# EAGLE board CT_schematic (EAGLE 7.6.0)

Size 100 x 80 mm. Coordinates in mm from the lower left corner, seen from the top.
Outline: 0,0 100,0 100,80 0,80 0,0
Copper layers (1*16): Top 0.035mm / dielectric 1.5mm / Bottom 0.035mm
Design rules "default": minimum track width 10mil, minimum drill 24mil, track to track 8mil, track to pad 8mil, pad to pad 8mil, via to via 8mil, smd to smd 8mil, copper to edge 40mil, drill to drill 8mil, minimum pad ring 10mil, minimum via ring 8mil, stop-mask expansion 4mil, vias tented up to drill 0mil, thermal gap 10mil

## Footprints (pad centres in the part's own frame; a part is rotated, then mirrored left to right if it is on the bottom)
C0603 = smd 0.8 x 0.8: 1 -0.762,0; 2 0.762,0
C0402 = smd 0.5 x 0.5: 1 -0.508,0; 2 0.508,0
C0805 = smd 1.2 x 1.3: 1 -1.016,0; 2 1.016,0
C1210 = smd 1.2 x 2.5: 1 -1.524,0; 2 1.524,0
R0603 = smd 0.8 x 0.8: 1 -0.762,0; 2 0.762,0
EXV-9H = smd 3.505 x 1.676: 1 -2.857,0; 2 2.857,0
L0603 = smd 0.8 x 0.8: 1 -0.762,0; 2 0.762,0
IND25X25CZ = smd 2.489 x 3.429: 1 -2.718,0; 2 2.718,0
PJ-037B_PACKAGE = drill 3.7 square: 1 12,0 | drill 3.2 square: 2 6,0
LQFP208 = smd 0.3 x 1.2: 1 -12.75,-14.4; 2 -12.25,-14.4; 3 -11.75,-14.4; 4 -11.25,-14.4; 5 -10.75,-14.4; 6 -10.25,-14.4; 7 -9.75,-14.4; 8 -9.25,-14.4; 9 -8.75,-14.4; 10 -8.25,-14.4; 11 -7.75,-14.4; 12 -7.25,-14.4; 13 -6.75,-14.4; 14 -6.25,-14.4; 15 -5.75,-14.4; 16 -5.25,-14.4; 17 -4.75,-14.4; 18 -4.25,-14.4; 19 -3.75,-14.4; 20 -3.25,-14.4; 21 -2.75,-14.4; 22 -2.25,-14.4; 23 -1.75,-14.4; 24 -1.25,-14.4; 25 -0.75,-14.4; 26 -0.25,-14.4; 27 0.25,-14.4; 28 0.75,-14.4; 29 1.25,-14.4; 30 1.75,-14.4; 31 2.25,-14.4; 32 2.75,-14.4; 33 3.25,-14.4; 34 3.75,-14.4; 35 4.25,-14.4; 36 4.75,-14.4; 37 5.25,-14.4; 38 5.75,-14.4; 39 6.25,-14.4; 40 6.75,-14.4; 41 7.25,-14.4; 42 7.75,-14.4; 43 8.25,-14.4; 44 8.75,-14.4; 45 9.25,-14.4; 46 9.75,-14.4; 47 10.25,-14.4; 48 10.75,-14.4; 49 11.25,-14.4; 50 11.75,-14.4; 51 12.25,-14.4; 52 12.75,-14.4; 105 12.75,14.4; 106 12.25,14.4; 107 11.75,14.4; 108 11.25,14.4; 109 10.75,14.4; 110 10.25,14.4; 111 9.75,14.4; 112 9.25,14.4; 113 8.75,14.4; 114 8.25,14.4; 115 7.75,14.4; 116 7.25,14.4; 117 6.75,14.4; 118 6.25,14.4; 119 5.75,14.4; 120 5.25,14.4; 121 4.75,14.4; 122 4.25,14.4; 123 3.75,14.4; 124 3.25,14.4; 125 2.75,14.4; 126 2.25,14.4; 127 1.75,14.4; 128 1.25,14.4; 129 0.75,14.4; 130 0.25,14.4; 131 -0.25,14.4; 132 -0.75,14.4; 133 -1.25,14.4; 134 -1.75,14.4; 135 -2.25,14.4; 136 -2.75,14.4; 137 -3.25,14.4; 138 -3.75,14.4; 139 -4.25,14.4; 140 -4.75,14.4; 141 -5.25,14.4; 142 -5.75,14.4; 143 -6.25,14.4; 144 -6.75,14.4; 145 -7.25,14.4; 146 -7.75,14.4; 147 -8.25,14.4; 148 -8.75,14.4; 149 -9.25,14.4; 150 -9.75,14.4; 151 -10.25,14.4; 152 -10.75,14.4; 153 -11.25,14.4; 154 -11.75,14.4; 155 -12.25,14.4; 156 -12.75,14.4 | smd 1.2 x 0.3: 53 14.4,-12.75; 54 14.4,-12.25; 55 14.4,-11.75; 56 14.4,-11.25; 57 14.4,-10.75; 58 14.4,-10.25; 59 14.4,-9.75; 60 14.4,-9.25; 61 14.4,-8.75; 62 14.4,-8.25; 63 14.4,-7.75; 64 14.4,-7.25; 65 14.4,-6.75; 66 14.4,-6.25; 67 14.4,-5.75; 68 14.4,-5.25; 69 14.4,-4.75; 70 14.4,-4.25; 71 14.4,-3.75; 72 14.4,-3.25; 73 14.4,-2.75; 74 14.4,-2.25; 75 14.4,-1.75; 76 14.4,-1.25; 77 14.4,-0.75; 78 14.4,-0.25; 79 14.4,0.25; 80 14.4,0.75; 81 14.4,1.25; 82 14.4,1.75; 83 14.4,2.25; 84 14.4,2.75; 85 14.4,3.25; 86 14.4,3.75; 87 14.4,4.25; 88 14.4,4.75; 89 14.4,5.25; 90 14.4,5.75; 91 14.4,6.25; 92 14.4,6.75; 93 14.4,7.25; 94 14.4,7.75; 95 14.4,8.25; 96 14.4,8.75; 97 14.4,9.25; 98 14.4,9.75; 99 14.4,10.25; 100 14.4,10.75; 101 14.4,11.25; 102 14.4,11.75; 103 14.4,12.25; 104 14.4,12.75; 157 -14.4,12.75; 158 -14.4,12.25; 159 -14.4,11.75; 160 -14.4,11.25; 161 -14.4,10.75; 162 -14.4,10.25; 163 -14.4,9.75; 164 -14.4,9.25; 165 -14.4,8.75; 166 -14.4,8.25; 167 -14.4,7.75; 168 -14.4,7.25; 169 -14.4,6.75; 170 -14.4,6.25; 171 -14.4,5.75; 172 -14.4,5.25; 173 -14.4,4.75; 174 -14.4,4.25; 175 -14.4,3.75; 176 -14.4,3.25; 177 -14.4,2.75; 178 -14.4,2.25; 179 -14.4,1.75; 180 -14.4,1.25; 181 -14.4,0.75; 182 -14.4,0.25; 183 -14.4,-0.25; 184 -14.4,-0.75; 185 -14.4,-1.25; 186 -14.4,-1.75; 187 -14.4,-2.25; 188 -14.4,-2.75; 189 -14.4,-3.25; 190 -14.4,-3.75; 191 -14.4,-4.25; 192 -14.4,-4.75; 193 -14.4,-5.25; 194 -14.4,-5.75; 195 -14.4,-6.25; 196 -14.4,-6.75; 197 -14.4,-7.25; 198 -14.4,-7.75; 199 -14.4,-8.25; 200 -14.4,-8.75; 201 -14.4,-9.25; 202 -14.4,-9.75; 203 -14.4,-10.25; 204 -14.4,-10.75; 205 -14.4,-11.25; 206 -14.4,-11.75; 207 -14.4,-12.25; 208 -14.4,-12.75
SSOP-28 = smd 1.5 x 0.4: 1 -3.625,4.225; 2 -3.625,3.575; 3 -3.625,2.925; 4 -3.625,2.275; 5 -3.625,1.625; 6 -3.625,0.975; 7 -3.625,0.325; 8 -3.625,-0.325; 9 -3.625,-0.975; 10 -3.625,-1.625; 11 -3.625,-2.275; 12 -3.625,-2.925; 13 -3.625,-3.575; 14 -3.625,-4.225; 15 3.625,-4.225; 16 3.625,-3.575; 17 3.625,-2.925; 18 3.625,-2.275; 19 3.625,-1.625; 20 3.625,-0.975; 21 3.625,-0.325; 22 3.625,0.325; 23 3.625,0.975; 24 3.625,1.625; 25 3.625,2.275; 26 3.625,2.925; 27 3.625,3.575; 28 3.625,4.225
FCI_10118193-0001LF = smd 0.4 x 1.35: 1 -1.3,2.675; 2 -0.65,2.675; 3 0,2.675; 4 0.65,2.675; 5 1.3,2.675 | smd 1.6 x 1.4: 6 -3.2,2.45; 7 3.2,2.45 | smd 1.9 x 1.9: 8 -1.2,0; 9 1.2,0 | hole 0.5: -3.3,0; 3.3,0
182-009-MALE = drill 1.194 pad 1.524 octagon: 1 -5.537,10.923; 2 -2.769,10.923; 3 0,10.923; 4 2.769,10.923; 5 5.537,10.923; 6 -4.153,8.08; 7 -1.384,8.08; 8 1.384,8.08; 9 4.153,8.08 | hole 3.048: -12.446,9.501; 12.446,9.501
RHB32_3P45X3P45 = smd 0.85 x 0.28: 1 -2.475,1.75; 2 -2.475,1.25; 3 -2.475,0.75; 4 -2.475,0.25; 5 -2.475,-0.25; 6 -2.475,-0.75; 7 -2.475,-1.25; 8 -2.475,-1.75; 17 2.475,-1.75; 18 2.475,-1.25; 19 2.475,-0.75; 20 2.475,-0.25; 21 2.475,0.25; 22 2.475,0.75; 23 2.475,1.25; 24 2.475,1.75 | smd 0.28 x 0.85: 9 -1.75,-2.475; 10 -1.25,-2.475; 11 -0.75,-2.475; 12 -0.25,-2.475; 13 0.25,-2.475; 14 0.75,-2.475; 15 1.25,-2.475; 16 1.75,-2.475; 25 1.75,2.475; 26 1.25,2.475; 27 0.75,2.475; 28 0.25,2.475; 29 -0.25,2.475; 30 -0.75,2.475; 31 -1.25,2.475; 32 -1.75,2.475 | smd 3.45 x 3.45: 33 0,0
MICRO_USB_AB = smd 0.4 x 1.35: 1 1.3,0.26; 2 0.65,0.26; 3 0,0.26; 4 -0.65,0.26; 5 -1.3,0.26 | drill 0.6 pad 0.95 long: 6 4.175,-2.54; 7 -4.175,-2.54 | drill 0.7 pad 1.1 long: 8 -2.225,0.46; 9 2.225,0.46
SOT143B = smd 1 x 0.7: 1 -0.75,-1 | smd 0.6 x 0.7: 2 0.95,-1; 3 0.95,1; 4 -0.95,1
SOT-23-6 = smd 1.1 x 0.6: 1 -1.4,0.95; 2 -1.4,0; 3 -1.4,-0.95; 4 1.4,-0.95; 5 1.4,0; 6 1.4,0.95
ABS07-32.768KHZ-7-T = smd 1.1 x 2.4: 1 -2.5,0; 2 0,0
ABLS-12.000MHZ-B4-T = smd 5.6 x 2.8: 1 0,0; 2 9.5,0
ASFL1 = smd 1.7 x 1.5: 1 -1.27,-1.1; 2 1.27,-1.1; 3 1.27,1.1; 4 -1.27,1.1
IR3899MTR1PBF = smd 0.25 x 0.75: 1 0,0; 2 0.5,0; 3 1,0; 4 1.5,0; 5 2,0; 6 2.5,0; 7 3,0 | smd 0.75 x 0.25: 8 3.425,0.78; 9 3.425,1.28; 10 3.425,1.78; 14 -0.425,1.78; 15 -0.425,1.28; 16 -0.425,0.78 | smd 0.3 x 1.95: 11 3.22,3.63 | smd 1.62 x 2.42: 12 1.786,3.8 | smd 1 x 1.95: 13 0.117,3.63 | smd 2.19 x 1.25: 17 1.51,1.26
SON-6 = smd 0.55 x 0.3: 1 -0.355,0.5 | smd 0.52 x 0.3: 2 -0.37,0; 3 -0.37,-0.5; 4 0.37,-0.5; 5 0.37,0; 6 0.37,0.5
RUT0012A = smd 0.7 x 0.2: 1 -0.7,0.8; 2 -0.7,0.4; 3 -0.7,0; 4 -0.7,-0.4; 5 -0.7,-0.8; 7 0.7,-0.8; 8 0.7,-0.4; 9 0.7,0; 10 0.7,0.4; 11 0.7,0.8 | smd 0.2 x 0.7: 6 0,-0.85; 12 0,0.85
SW_4-1437565-2 = smd 1.4 x 2.1: 1 -2.23,4.55; 2 -2.23,-4.55; 3 2.23,4.55; 4 2.23,-4.55
LGM67K-G1J2-24-Z = smd 0.8 x 1.4: A -2,0; C 0,0
NC7SZ125M5X = smd 1.3 x 0.7: 1 -1.3,0.95; 2 -1.3,0; 3 -1.3,-0.95; 4 1.3,-0.95; 5 1.3,0.95

## Placement (x,y rotation side)
C1  1e-06  [C0603]  -34.29,90.17 0 top  (outside the outline)
C2  1e-07  [C0603]  -38.1,90.17 0 top  (outside the outline)
C3  1e-07  [C0603]  -41.91,90.17 0 top  (outside the outline)
C4  1e-07  [C0603]  -45.72,90.17 0 top  (outside the outline)
C5  1e-07  [C0603]  -49.53,90.17 0 top  (outside the outline)
C6  1e-07  [C0603]  -53.34,90.17 0 top  (outside the outline)
C7  1e-07  [C0603]  -57.15,90.17 0 top  (outside the outline)
C8  1e-07  [C0603]  -60.96,90.17 0 top  (outside the outline)
C9  1e-07  [C0603]  -64.77,90.17 0 top  (outside the outline)
C10  1e-07  [C0603]  -68.58,90.17 0 top  (outside the outline)
C11  1e-07  [C0603]  -72.39,90.17 0 top  (outside the outline)
C12  1e-07  [C0603]  -76.2,90.17 0 top  (outside the outline)
C13  1e-07  [C0603]  -80.01,90.17 0 top  (outside the outline)
C14  1e-07  [C0603]  -83.82,90.17 0 top  (outside the outline)
C15  1e-07  [C0603]  -87.63,90.17 0 top  (outside the outline)
C16  1e-07  [C0603]  -91.44,90.17 0 top  (outside the outline)
C17  1e-07  [C0603]  -95.25,90.17 0 top  (outside the outline)
C18  1e-07  [C0603]  -99.06,90.17 0 top  (outside the outline)
C19  1e-07  [C0603]  -15.24,95.25 0 top  (outside the outline)
C20  4.7e-06  [C0603]  -90.17,85.09 0 top  (outside the outline)
C21  2.2e-06  [C0603]  -93.98,85.09 0 top  (outside the outline)
C22  2.2e-06  [C0603]  -97.79,85.09 0 top  (outside the outline)
C23  1e-08  [C0603]  -19.05,95.25 0 top  (outside the outline)
C24  1e-06  [C0603]  -22.86,95.25 0 top  (outside the outline)
C25  1e-07  [C0603]  -26.67,95.25 0 top  (outside the outline)
C26  1e-07  [C0603]  -30.48,95.25 0 top  (outside the outline)
C27  1e-11  [C0402]  -95.25,95.25 0 top  (outside the outline)
C28  1e-11  [C0402]  -99.06,95.25 0 top  (outside the outline)
C29  1e-06  [C0603]  -34.29,95.25 0 top  (outside the outline)
C30  1e-07  [C0402]  -15.24,100.33 0 top  (outside the outline)
C31  4.7e-06  [C0805]  -15.24,74.93 0 top  (outside the outline)
C32  1e-07  [C0402]  -19.05,100.33 0 top  (outside the outline)
C33  1e-07  [C0402]  -22.86,100.33 0 top  (outside the outline)
C34  1e-07  [C0402]  -26.67,100.33 0 top  (outside the outline)
C35  4.7e-06  [C0805]  -20.32,74.93 0 top  (outside the outline)
C36  1e-07  [C0402]  -30.48,100.33 0 top  (outside the outline)
C37  1e-07  [C0402]  -34.29,100.33 0 top  (outside the outline)
C38  1e-07  [C0402]  -38.1,100.33 0 top  (outside the outline)
C39  1e-07  [C0402]  -41.91,100.33 0 top  (outside the outline)
C40  1e-07  [C0402]  -45.72,100.33 0 top  (outside the outline)
C41  1e-07  [C0402]  -49.53,100.33 0 top  (outside the outline)
C42  1e-07  [C0402]  -53.34,100.33 0 top  (outside the outline)
C43  1e-07  [C0402]  -57.15,100.33 0 top  (outside the outline)
C44  2.2e-06  [C0603]  -15.24,90.17 0 top  (outside the outline)
C45  1e-07  [C0402]  -60.96,100.33 0 top  (outside the outline)
C46  1e-07  [C0402]  -64.77,100.33 0 top  (outside the outline)
C47  2.2e-06  [C0603]  -19.05,90.17 0 top  (outside the outline)
C48  1e-06  [C0603]  -38.1,95.25 0 top  (outside the outline)
C49  1e-08  [C0402]  -68.58,100.33 0 top  (outside the outline)
C50  1e-08  [C0402]  -72.39,100.33 0 top  (outside the outline)
C51  0.0001  [C1210]  -66.04,68.58 0 top  (outside the outline)
C52  2.2e-06  [C0603]  -22.86,90.17 0 top  (outside the outline)
C53  1e-07  [C0402]  -76.2,100.33 0 top  (outside the outline)
C54  1e-07  [C0402]  -80.01,100.33 0 top  (outside the outline)
C55  8.5935703950126e-09  [R0603]  -30.48,74.93 0 top  (outside the outline)
C56  2.929626271027e-07  [R0603]  -59.69,74.93 0 top  (outside the outline)
C59  0.0001  [C1210]  -72.39,68.58 0 top  (outside the outline)
C60  2.2e-06  [C0603]  -26.67,90.17 0 top  (outside the outline)
C61  1e-07  [C0402]  -83.82,100.33 0 top  (outside the outline)
C62  1e-07  [C0402]  -87.63,100.33 0 top  (outside the outline)
C63  8.5935703950126e-09  [R0603]  -40.64,74.93 0 top  (outside the outline)
C64  2.929626271027e-07  [R0603]  -68.58,74.93 0 top  (outside the outline)
C67  0.0001  [C1210]  -78.74,68.58 0 top  (outside the outline)
C68  2.2e-06  [C0603]  -30.48,90.17 0 top  (outside the outline)
C69  1e-07  [C0402]  -91.44,100.33 0 top  (outside the outline)
C70  1e-07  [C0402]  -95.25,100.33 0 top  (outside the outline)
C71  8.5935703950126e-09  [R0603]  -50.8,74.93 0 top  (outside the outline)
C72  2.929626271027e-07  [R0603]  -77.47,74.93 0 top  (outside the outline)
C75  1e-07  [C0402]  -99.06,100.33 0 top  (outside the outline)
C76  0.0001  [EXV-9H]  -29.21,59.69 0 top  (outside the outline)
C77  0.0001  [EXV-9H]  -40.64,59.69 0 top  (outside the outline)
C78  1e-08  [C0402]  -15.24,105.41 0 top  (outside the outline)
C79  1e-07  [C0402]  -19.05,105.41 0 top  (outside the outline)
C80  1e-08  [C0402]  -22.86,105.41 0 top  (outside the outline)
C81  1e-07  [C0402]  -26.67,105.41 0 top  (outside the outline)
C82  1e-08  [C0402]  -30.48,105.41 0 top  (outside the outline)
C83  1e-08  [C0402]  -34.29,105.41 0 top  (outside the outline)
F1  240.0  [L0603]  -41.91,95.25 0 top  (outside the outline)
I1  6.8e-07  [IND25X25CZ]  -90.17,59.69 0 top  (outside the outline)
I2  6.8e-07  [IND25X25CZ]  -99.06,59.69 0 top  (outside the outline)
I3  6.8e-07  [IND25X25CZ]  -17.78,68.58 0 top  (outside the outline)
J1  PJ-037B  [PJ-037B_PACKAGE]  -52.07,38.1 0 top  (outside the outline)
R2  1000.0  [R0603]  -45.72,95.25 0 top  (outside the outline)
R4  4700.0  [R0603]  -49.53,95.25 0 top  (outside the outline)
R5  4700.0  [R0603]  -53.34,95.25 0 top  (outside the outline)
R6  10000.0  [R0603]  -90.17,80.01 0 top  (outside the outline)
R7  10000.0  [R0603]  -95.25,80.01 0 top  (outside the outline)
R8  4700.0  [R0603]  -57.15,95.25 0 top  (outside the outline)
R9  10000.0  [R0603]  -100.33,80.01 0 top  (outside the outline)
R10  10000.0  [R0603]  -15.24,85.09 0 top  (outside the outline)
R11  4700.0  [R0603]  -60.96,95.25 0 top  (outside the outline)
R12  10000.0  [R0603]  -20.32,85.09 0 top  (outside the outline)
R13  10000.0  [R0603]  -25.4,85.09 0 top  (outside the outline)
R14  100000.0  [R0603]  -69.85,80.01 0 top  (outside the outline)
R15  47000.0  [R0603]  -30.48,85.09 0 top  (outside the outline)
R16  10000.0  [R0603]  -35.56,85.09 0 top  (outside the outline)
R17  10000.0  [R0603]  -40.64,85.09 0 top  (outside the outline)
R18  0.1  [R0603]  -64.77,95.25 0 top  (outside the outline)
R19  4030.2416170974  [R0603]  -85.09,74.93 0 top  (outside the outline)
R20  1600.0  [R0603]  -68.58,95.25 0 top  (outside the outline)
R21  59.319518072289  [R0603]  -92.71,74.93 0 top  (outside the outline)
R22  130.0  [R0603]  -72.39,95.25 0 top  (outside the outline)
R23  39000.0  [R0603]  -45.72,85.09 0 top  (outside the outline)
R24  49900.0  [R0603]  -50.8,85.09 0 top  (outside the outline)
R25  5216.2133333333  [R0603]  -100.33,74.93 0 top  (outside the outline)
R26  0.1  [R0603]  -76.2,95.25 0 top  (outside the outline)
R27  4030.2416170974  [R0603]  -19.05,80.01 0 top  (outside the outline)
R28  719.68600305311  [R0603]  -26.67,80.01 0 top  (outside the outline)
R29  59.319518072289  [R0603]  -34.29,80.01 0 top  (outside the outline)
R30  130.0  [R0603]  -80.01,95.25 0 top  (outside the outline)
R31  39000.0  [R0603]  -55.88,85.09 0 top  (outside the outline)
R32  49900.0  [R0603]  -60.96,85.09 0 top  (outside the outline)
R33  5216.2133333333  [R0603]  -41.91,80.01 0 top  (outside the outline)
R34  0.1  [R0603]  -83.82,95.25 0 top  (outside the outline)
R35  4030.2416170974  [R0603]  -49.53,80.01 0 top  (outside the outline)
R36  453.0  [R0603]  -87.63,95.25 0 top  (outside the outline)
R37  59.319518072289  [R0603]  -57.15,80.01 0 top  (outside the outline)
R38  130.0  [R0603]  -91.44,95.25 0 top  (outside the outline)
R39  39000.0  [R0603]  -66.04,85.09 0 top  (outside the outline)
R40  49900.0  [R0603]  -71.12,85.09 0 top  (outside the outline)
R41  5216.2133333333  [R0603]  -64.77,80.01 0 top  (outside the outline)
R42  10000.0  [R0603]  -76.2,85.09 0 top  (outside the outline)
R43  10000.0  [R0603]  -81.28,85.09 0 top  (outside the outline)
R44  82000.0  [R0603]  -86.36,85.09 0 top  (outside the outline)
R45  300000.0  [R0603]  -74.93,80.01 0 top  (outside the outline)
R46  120000.0  [R0603]  -80.01,80.01 0 top  (outside the outline)
R47  200000.0  [R0603]  -85.09,80.01 0 top  (outside the outline)
U1  STM32F765BGT6  [LQFP208]  -27.94,15.24 0 top  (outside the outline)
U2  FT232RL-REEL  [SSOP-28]  -90.17,7.62 0 top  (outside the outline)
U3  10118193-0001LF  [FCI_10118193-0001LF]  -83.82,49.53 0 top  (outside the outline)
U4  FT232RL-REEL  [SSOP-28]  -20.32,38.1 0 top  (outside the outline)
U5  10118193-0001LF  [FCI_10118193-0001LF]  -93.98,49.53 0 top  (outside the outline)
U6  ST3241EBPR  [SSOP-28]  -31.75,38.1 0 top  (outside the outline)
U7  182-009-113R531  [182-009-MALE]  -66.04,6.35 0 top  (outside the outline)
U8  TUSB1210BRHBR  [RHB32_3P45X3P45]  -25.4,68.58 0 top  (outside the outline)
U9  47590-0001  [MICRO_USB_AB]  -60.96,38.1 0 top  (outside the outline)
U10  prtr5v0u2ax  [SOT143B]  -46.99,105.41 0 top  (outside the outline)
U11  MAX4995AAUT+T  [SOT-23-6]  -85.09,67.31 0 top  (outside the outline)
U12  10118193-0001LF  [FCI_10118193-0001LF]  -19.05,59.69 0 top  (outside the outline)
U13  prtr5v0u2ax  [SOT143B]  -59.69,105.41 0 top  (outside the outline)
U14  ABS07-32.768KHZ-7-T  [ABS07-32.768KHZ-7-T]  -45.72,68.58 0 top  (outside the outline)
U15  ABLS-12.000MHZ-B4-T  [ABLS-12.000MHZ-B4-T]  -62.23,60.96 0 top  (outside the outline)
U16  ABLS-12.000MHZ-B4-T  [ABLS-12.000MHZ-B4-T]  -82.55,60.96 0 top  (outside the outline)
U17  ASFL1-19.2MHZ-NCS  [ASFL1]  -58.42,50.8 0 top  (outside the outline)
U18  ASFL1-25MHZ-NCS  [ASFL1]  -74.93,50.8 0 top  (outside the outline)
U19  IR3899MTR1PBF  [IR3899MTR1PBF]  -97.79,33.02 0 top  (outside the outline)
U20  IR3899MTR1PBF  [IR3899MTR1PBF]  -25.4,48.26 0 top  (outside the outline)
U21  IR3899MTR1PBF  [IR3899MTR1PBF]  -40.64,48.26 0 top  (outside the outline)
U22  TPS3895ADRYR  [SON-6]  -78.74,104.14 0 top  (outside the outline)
U23  LSF0204DRUTR  [RUT0012A]  -73.66,105.41 0 top  (outside the outline)
U24  4-1437565-2  [SW_4-1437565-2]  -81.28,36.83 0 top  (outside the outline)
U25  Q65110A2395  [LGM67K-G1J2-24-Z]  -54.61,68.58 0 top  (outside the outline)
U26  nc7sz125m5x  [NC7SZ125M5X]  -90.17,67.31 0 top  (outside the outline)
U27  nc7sz125m5x  [NC7SZ125M5X]  -96.52,67.31 0 top  (outside the outline)

## Library data of the parts
C1-C56 C59-C64 C67-C72 C75-C83 F1 I1-I3 J1 R2 R4-R47 U1-U27 = circuit_tree

## Nets
CLK_CRYSTAL_U1_9: C27.1 U1.9 U14.1
CLK_CRYSTAL_U1_10: C28.1 U1.10 U14.2
CLK_CRYSTAL_U2_27: U2.27 U15.1
CLK_CRYSTAL_U2_28: U2.28 U15.2
CLK_CRYSTAL_U4_27: U4.27 U16.1
CLK_CRYSTAL_U4_28: U4.28 U16.2
CLK_U1_32: U1.32 U18.3
CLK_U8_1: U8.1 U17.3
GND: C1.2 C2.2 C3.2 C4.2 C5.2 C6.2 C7.2 C8.2 C9.2 C10.2 C11.2 C12.2 C13.2 C14.2 C15.2 C16.2 C17.2 C18.2 C19.2 C20.2 C21.2 C22.2 C23.2 C24.2 C25.2 C26.2 C27.2 C28.2 C29.2 C30.2 C31.2 C32.2 C33.2 C34.2 C35.2 C36.2 C37.2 C38.2 C41.2 C42.2 C43.2 C44.2 C45.2 C46.2 C47.2 C48.2 C49.2 C50.2 C52.2 C53.2 C54.2 C60.2 C61.2 C62.2 C68.2 C69.2 C70.2 C75.2 C76.2 C77.2 C78.2 C79.2 C80.2 C81.2 C82.2 C83.2 J1.2 R2.2 R6.2 R10.2 R13.2 R15.2 R17.2 R18.1 R18.2 R20.2 R23.2 R25.2 R26.1 R26.2 R28.2 R31.2 R33.2 R34.1 R34.2 R36.2 R39.2 R41.2 R44.2 R46.2 U1.14 U1.25 U1.40 U1.51 U1.60 U1.72 U1.82 U1.93 U1.114 U1.125 U1.136 U1.145 U1.149 U1.170 U1.184 U1.202 U2.7 U2.18 U2.21 U2.25 U2.26 U3.5 U3.6 U3.7 U3.8 U3.9 U4.7 U4.18 U4.21 U4.25 U4.26 U5.5 U5.6 U5.7 U5.8 U5.9 U6.23 U6.25 U7.5 U8.33 U9.5 U9.6 U9.7 U9.8 U9.9 U10.1 U11.2 U12.5 U12.6 U12.7 U12.8 U12.9 U13.1 U17.2 U18.2 U19.4 U19.11 U19.17 U20.4 U20.11 U20.17 U21.4 U21.11 U21.17 U22.2 U23.6 U25.C U26.1 U26.3 U27.1 U27.3
NET_U1_34: R4.1 U1.34 U26.4
NET_U1_42: C23.1 C24.1 F1.1 U1.41 U1.42
NET_U1_92: C21.1 U1.92
NET_U1_148: C22.1 U1.148
NET_U1_197: R6.1 U1.197
NET_U1_203: R7.1 U1.203
NET_U1_207: U25.A
NET_U1_208: U24.3 U24.4
NET_U2_14: R9.1 U2.14
NET_U2_17: C32.1 U2.17
NET_U2_19: R10.1 U2.19
NET_U3_1: R8.1 U3.1
NET_U3_2: U2.16 U3.2
NET_U3_3: U2.15 U3.3
NET_U3_19: R8.2
NET_U4_14: R12.1 U4.14
NET_U4_17: C36.1 U4.17
NET_U4_19: R13.1 U4.19
NET_U5_1: R11.1 U5.1
NET_U5_2: U4.16 U5.2
NET_U5_3: U4.15 U5.3
NET_U5_19: R11.2
NET_U6_1: C40.1 U6.1
NET_U6_2: C40.2 U6.2
NET_U6_3: C42.1 U6.3
NET_U6_22: R14.1 U6.22
NET_U6_24: C39.2 U6.24
NET_U6_27: C41.1 U6.27
NET_U6_28: C39.1 U6.28
NET_U7_2: U6.4 U7.2
NET_U7_3: U6.9 U7.3
NET_U7_7: U6.5 U7.7
NET_U7_8: U6.10 U7.8
NET_U8_11: R16.1 U8.11
NET_U8_12: C47.1 U8.12
NET_U8_14: R17.1 U8.14
NET_U8_20: C44.1 U8.20
NET_U8_27: R5.1 U8.27 U27.4
NET_U9_1: C48.1 U8.22 U9.1 U10.4 U11.1
NET_U9_2: U8.19 U9.2 U10.3
NET_U9_3: U8.18 U9.3 U10.2
NET_U9_4: U8.23 U9.4
NET_U11_3: R15.1 U11.3
NET_U11_4: U8.17 U11.4
NET_U19_1: C55.1 R19.1 R20.1 R21.1 R22.1 U19.1 U19.8
NET_U19_2: C54.1 U19.2
NET_U19_3: C55.2 C56.1 C56.2 U19.3
NET_U19_5: R23.1 U19.5
NET_U19_10: C52.1 U19.10
NET_U19_12: C51.1 I1.1 U19.12
NET_U19_13: U19.13
NET_U19_14: C51.2 U19.14
NET_U19_15: R24.1 R25.1 U19.15
NET_U19_ATNET_3: I1.2 R19.2
NET_U19_ATNET_4: C56.2 R21.2
NET_U19_ATNET_5: R22.2
NET_U20_1: C63.1 R27.1 R28.1 R29.1 R30.1 U20.1 U20.8
NET_U20_2: C62.1 U20.2
NET_U20_3: C63.2 C64.1 C64.2 U20.3
NET_U20_5: R31.1 U20.5
NET_U20_10: C60.1 U20.10
NET_U20_12: C59.1 I2.1 U20.12
NET_U20_13: U20.13
NET_U20_14: C59.2 U20.14
NET_U20_15: R32.1 R33.1 U20.15
NET_U20_ATNET_3: I2.2 R27.2
NET_U20_ATNET_4: C64.2 R29.2
NET_U20_ATNET_5: R30.2
NET_U21_1: C71.1 R35.1 R36.1 R37.1 R38.1 U21.1 U21.8
NET_U21_2: C70.1 U21.2
NET_U21_3: C71.2 C72.1 C72.2 U21.3
NET_U21_5: R39.1 U21.5
NET_U21_10: C68.1 U21.10
NET_U21_12: C67.1 I3.1 U21.12
NET_U21_13: U21.13
NET_U21_14: C67.2 U21.14
NET_U21_15: R40.1 R41.1 U21.15
NET_U21_ATNET_3: I3.2 R35.2
NET_U21_ATNET_4: C72.2 R37.2
NET_U21_ATNET_5: R38.2
NET_U22_1: R43.1 R44.1 U22.1
NET_U22_3: R45.2 R46.1 U22.3
NET_U22_4: R42.1 U22.4 U26.2 U27.2
NET_U23_12: R47.1 U23.12
NET_U24_1: R2.1 U24.1 U24.2
PROC_UART4_CTS: U1.107 U2.3
PROC_UART4_RTS: U1.106 U2.11
PROC_UART4_RX: U1.11 U2.1
PROC_UART4_TX: U1.43 U2.5
PROC_UART5_CTS: U1.141 U4.3
PROC_UART5_RTS: U1.140 U4.11
PROC_UART5_RX: U1.166 U4.1
PROC_UART5_TX: U1.163 U4.5
PROC_UART7_CTS_TOIOBUF: U23.3
PROC_UART7_CTS_TOXCVR: U6.13 U23.9
PROC_UART7_RTS_TOIOBUF: U23.4
PROC_UART7_RTS_TOXCVR: U6.18 U23.8
PROC_UART7_RX_TOIOBUF: U23.5
PROC_UART7_RX_TOXCVR: U6.19 U23.7
PROC_UART7_TX_TOIOBUF: U23.2
PROC_UART7_TX_TOXCVR: U6.14 U23.10
PROC_USB_OTG_FS_DM: U1.145 U12.2 U13.3
PROC_USB_OTG_FS_DP: U1.146 U12.3 U13.2
PROC_USB_OTG_FS_VBUS: C29.1 U1.143 U12.1 U13.4
PROC_USB_OTG_HS_ULPI_CK: U1.54 U8.26
PROC_USB_OTG_HS_ULPI_D0: U1.50 U8.3
PROC_USB_OTG_HS_ULPI_D1: U1.61 U8.4
PROC_USB_OTG_HS_ULPI_D2: U1.62 U8.5
PROC_USB_OTG_HS_ULPI_D3: U1.90 U8.6
PROC_USB_OTG_HS_ULPI_D4: U1.91 U8.7
PROC_USB_OTG_HS_ULPI_D5: U1.104 U8.9
PROC_USB_OTG_HS_ULPI_D6: U1.105 U8.10
PROC_USB_OTG_HS_ULPI_D7: U1.194 U8.13
PROC_USB_OTG_HS_ULPI_DIR: U1.13 U8.31
PROC_USB_OTG_HS_ULPI_NXT: U1.38 U8.2
PROC_USB_OTG_HS_ULPI_STP: U1.35 U8.29
VCC_S1_16V6: C53.1 C61.1 C69.1 C76.1 C77.1 J1.1 R24.2 R32.2 R40.2 U19.9 U20.9 U21.9
VCC_TIER1_1V8: C1.1 C2.1 C3.1 C4.1 C5.1 C6.1 C7.1 C8.1 C9.1 C10.1 C11.1 C12.1 C13.1 C14.1 C15.1 C16.1 C17.1 C18.1 C19.1 C20.1 C25.1 C26.1 C33.1 C37.1 C45.1 C46.1 C75.1 C80.1 C81.1 C82.1 C83.1 F1.2 I1.2 R4.2 R5.2 R7.2 R16.2 R19.2 R42.2 R43.2 R45.1 R47.2 U1.6 U1.15 U1.26 U1.39 U1.52 U1.59 U1.73 U1.83 U1.94 U1.103 U1.115 U1.124 U1.137 U1.150 U1.158 U1.171 U1.185 U1.204 U2.4 U4.4 U8.28 U8.30 U8.32 U22.6 U23.1 U26.5 U27.5
VCC_TIER1_3V3: C30.1 C31.1 C34.1 C35.1 C38.1 C43.1 C49.1 C50.1 C78.1 C79.1 I2.2 R9.2 R12.2 R14.2 R27.2 U2.20 U4.20 U6.26 U8.21 U17.4 U18.4 U23.11
VCC_TIER1_5V0: I3.2 R35.2 U11.5

## Tracks (layer width: path | path; a pad name or v marks a point on that pad's centre or on a via)
CLK_CRYSTAL_U1_9  (2 unrouted)
CLK_CRYSTAL_U1_10  (2 unrouted)
CLK_CRYSTAL_U2_27  (1 unrouted)
CLK_CRYSTAL_U2_28  (1 unrouted)
CLK_CRYSTAL_U4_27  (1 unrouted)
CLK_CRYSTAL_U4_28  (1 unrouted)
CLK_U1_32  (1 unrouted)
CLK_U8_1  (1 unrouted)
GND  (160 unrouted)
NET_U1_34  (2 unrouted)
NET_U1_42  (4 unrouted)
NET_U1_92  (1 unrouted)
NET_U1_148  (1 unrouted)
NET_U1_197  (1 unrouted)
NET_U1_203  (1 unrouted)
NET_U1_208  (1 unrouted)
NET_U2_14  (1 unrouted)
NET_U2_17  (1 unrouted)
NET_U2_19  (1 unrouted)
NET_U3_1  (1 unrouted)
NET_U3_2  (1 unrouted)
NET_U3_3  (1 unrouted)
NET_U4_14  (1 unrouted)
NET_U4_17  (1 unrouted)
NET_U4_19  (1 unrouted)
NET_U5_1  (1 unrouted)
NET_U5_2  (1 unrouted)
NET_U5_3  (1 unrouted)
NET_U6_1  (1 unrouted)
NET_U6_2  (1 unrouted)
NET_U6_3  (1 unrouted)
NET_U6_22  (1 unrouted)
NET_U6_24  (1 unrouted)
NET_U6_27  (1 unrouted)
NET_U6_28  (1 unrouted)
NET_U7_2  (1 unrouted)
NET_U7_3  (1 unrouted)
NET_U7_7  (1 unrouted)
NET_U7_8  (1 unrouted)
NET_U8_11  (1 unrouted)
NET_U8_12  (1 unrouted)
NET_U8_14  (1 unrouted)
NET_U8_20  (1 unrouted)
NET_U8_27  (2 unrouted)
NET_U9_1  (4 unrouted)
NET_U9_2  (2 unrouted)
NET_U9_3  (2 unrouted)
NET_U9_4  (1 unrouted)
NET_U11_3  (1 unrouted)
NET_U11_4  (1 unrouted)
NET_U19_1  (6 unrouted)
NET_U19_2  (1 unrouted)
NET_U19_3  (3 unrouted)
NET_U19_5  (1 unrouted)
NET_U19_10  (1 unrouted)
NET_U19_12  (2 unrouted)
NET_U19_14  (1 unrouted)
NET_U19_15  (2 unrouted)
NET_U19_ATNET_3  (1 unrouted)
NET_U19_ATNET_4  (1 unrouted)
NET_U20_1  (6 unrouted)
NET_U20_2  (1 unrouted)
NET_U20_3  (3 unrouted)
NET_U20_5  (1 unrouted)
NET_U20_10  (1 unrouted)
NET_U20_12  (2 unrouted)
NET_U20_14  (1 unrouted)
NET_U20_15  (2 unrouted)
NET_U20_ATNET_3  (1 unrouted)
NET_U20_ATNET_4  (1 unrouted)
NET_U21_1  (6 unrouted)
NET_U21_2  (1 unrouted)
NET_U21_3  (3 unrouted)
NET_U21_5  (1 unrouted)
NET_U21_10  (1 unrouted)
NET_U21_12  (2 unrouted)
NET_U21_14  (1 unrouted)
NET_U21_15  (2 unrouted)
NET_U21_ATNET_3  (1 unrouted)
NET_U21_ATNET_4  (1 unrouted)
NET_U22_1  (2 unrouted)
NET_U22_3  (2 unrouted)
NET_U22_4  (3 unrouted)
NET_U23_12  (1 unrouted)
NET_U24_1  (2 unrouted)
PROC_UART4_CTS  (1 unrouted)
PROC_UART4_RTS  (1 unrouted)
PROC_UART4_RX  (1 unrouted)
PROC_UART4_TX  (1 unrouted)
PROC_UART5_CTS  (1 unrouted)
PROC_UART5_RTS  (1 unrouted)
PROC_UART5_RX  (1 unrouted)
PROC_UART5_TX  (1 unrouted)
PROC_UART7_CTS_TOXCVR  (1 unrouted)
PROC_UART7_RTS_TOXCVR  (1 unrouted)
PROC_UART7_RX_TOXCVR  (1 unrouted)
PROC_UART7_TX_TOXCVR  (1 unrouted)
PROC_USB_OTG_FS_DM  (2 unrouted)
PROC_USB_OTG_FS_DP  (2 unrouted)
PROC_USB_OTG_FS_VBUS  (3 unrouted)
PROC_USB_OTG_HS_ULPI_CK  (1 unrouted)
PROC_USB_OTG_HS_ULPI_D0  (1 unrouted)
PROC_USB_OTG_HS_ULPI_D1  (1 unrouted)
PROC_USB_OTG_HS_ULPI_D2  (1 unrouted)
PROC_USB_OTG_HS_ULPI_D3  (1 unrouted)
PROC_USB_OTG_HS_ULPI_D4  (1 unrouted)
PROC_USB_OTG_HS_ULPI_D5  (1 unrouted)
PROC_USB_OTG_HS_ULPI_D6  (1 unrouted)
PROC_USB_OTG_HS_ULPI_D7  (1 unrouted)
PROC_USB_OTG_HS_ULPI_DIR  (1 unrouted)
PROC_USB_OTG_HS_ULPI_NXT  (1 unrouted)
PROC_USB_OTG_HS_ULPI_STP  (1 unrouted)
VCC_S1_16V6  (11 unrouted)
VCC_TIER1_1V8  (68 unrouted)
VCC_TIER1_3V3  (21 unrouted)
VCC_TIER1_5V0  (2 unrouted)